# Altium PCB 24.064.PcbDoc
Units mil, origin at the board's own origin, x right, y up, seen from the top; angles counter-clockwise.
Board outline 2716.54 x 2047.24 mil, 2 copper layers (Top Layer, Bottom Layer); 5 components, 16 nets, 53 pads, 3 vias.
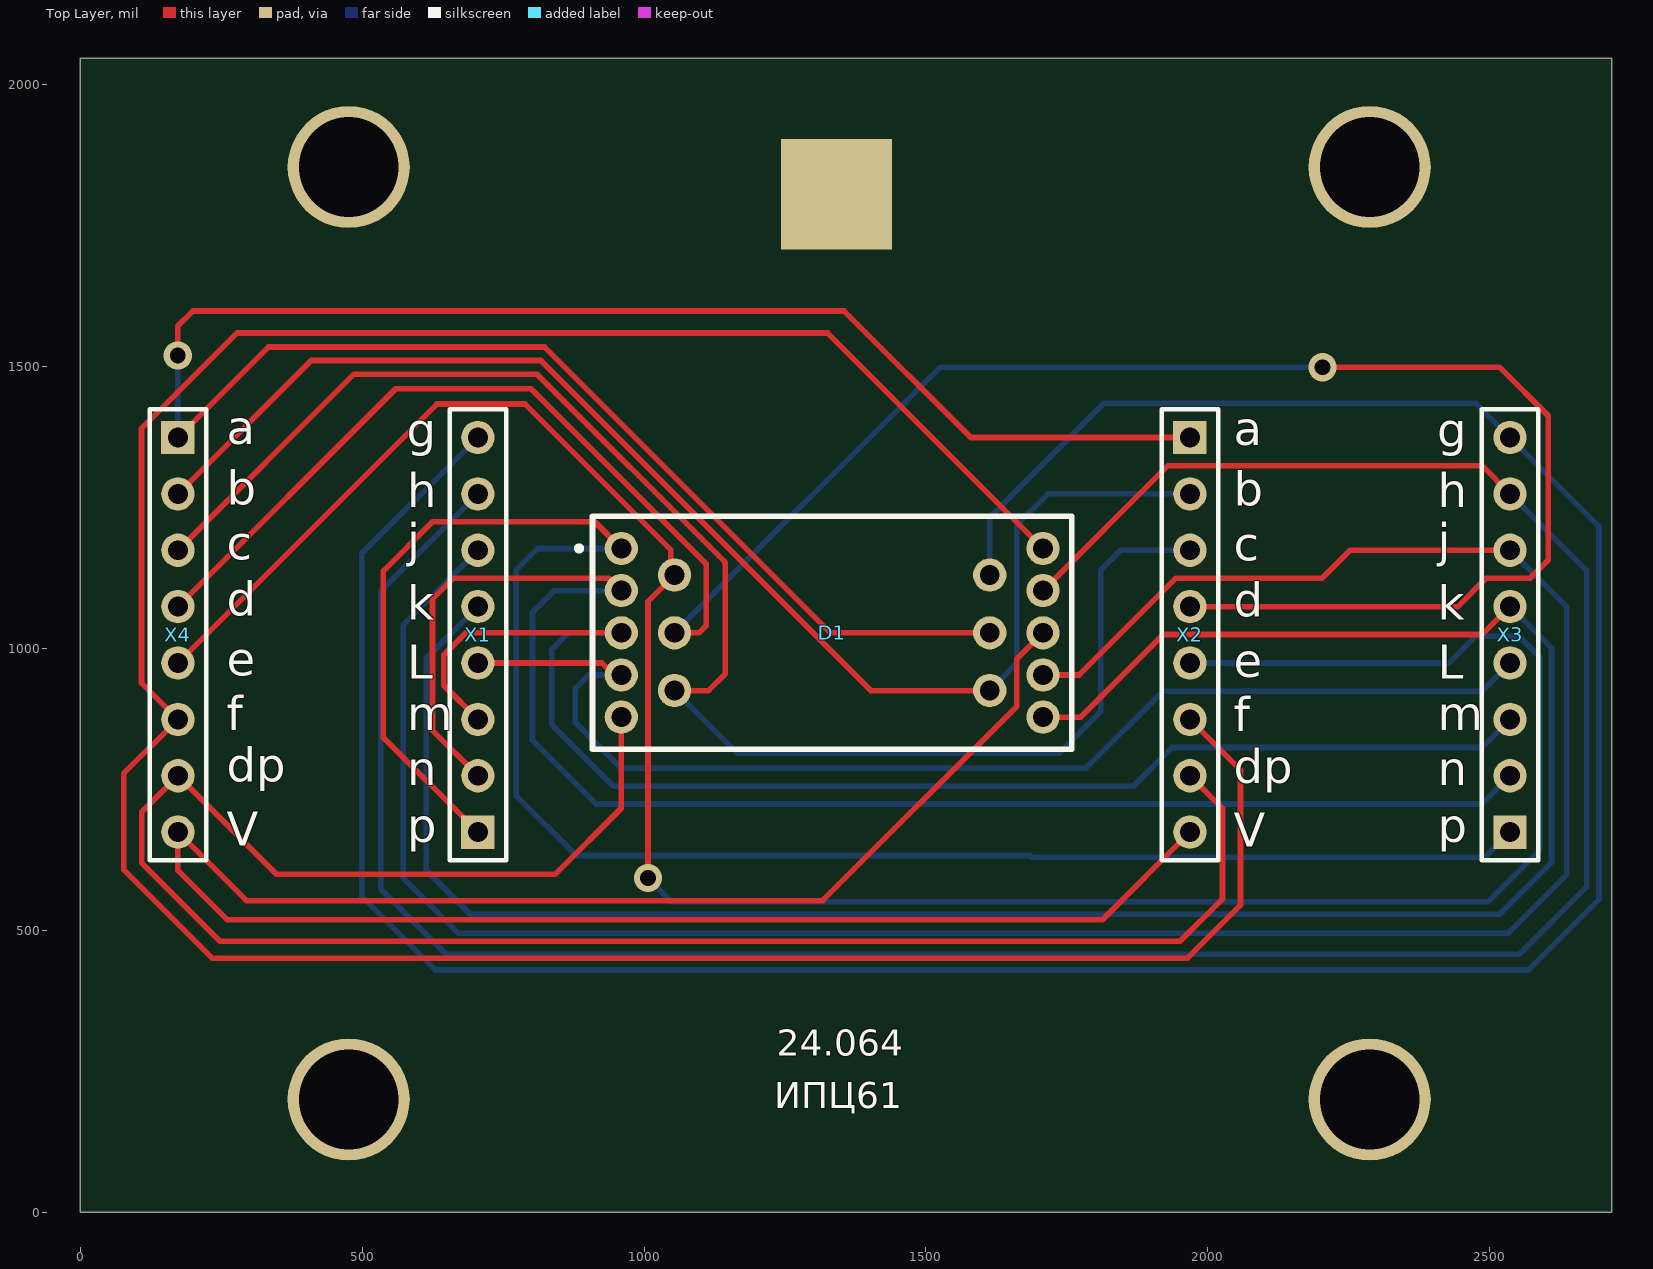
[diagram p0: Top Layer view]
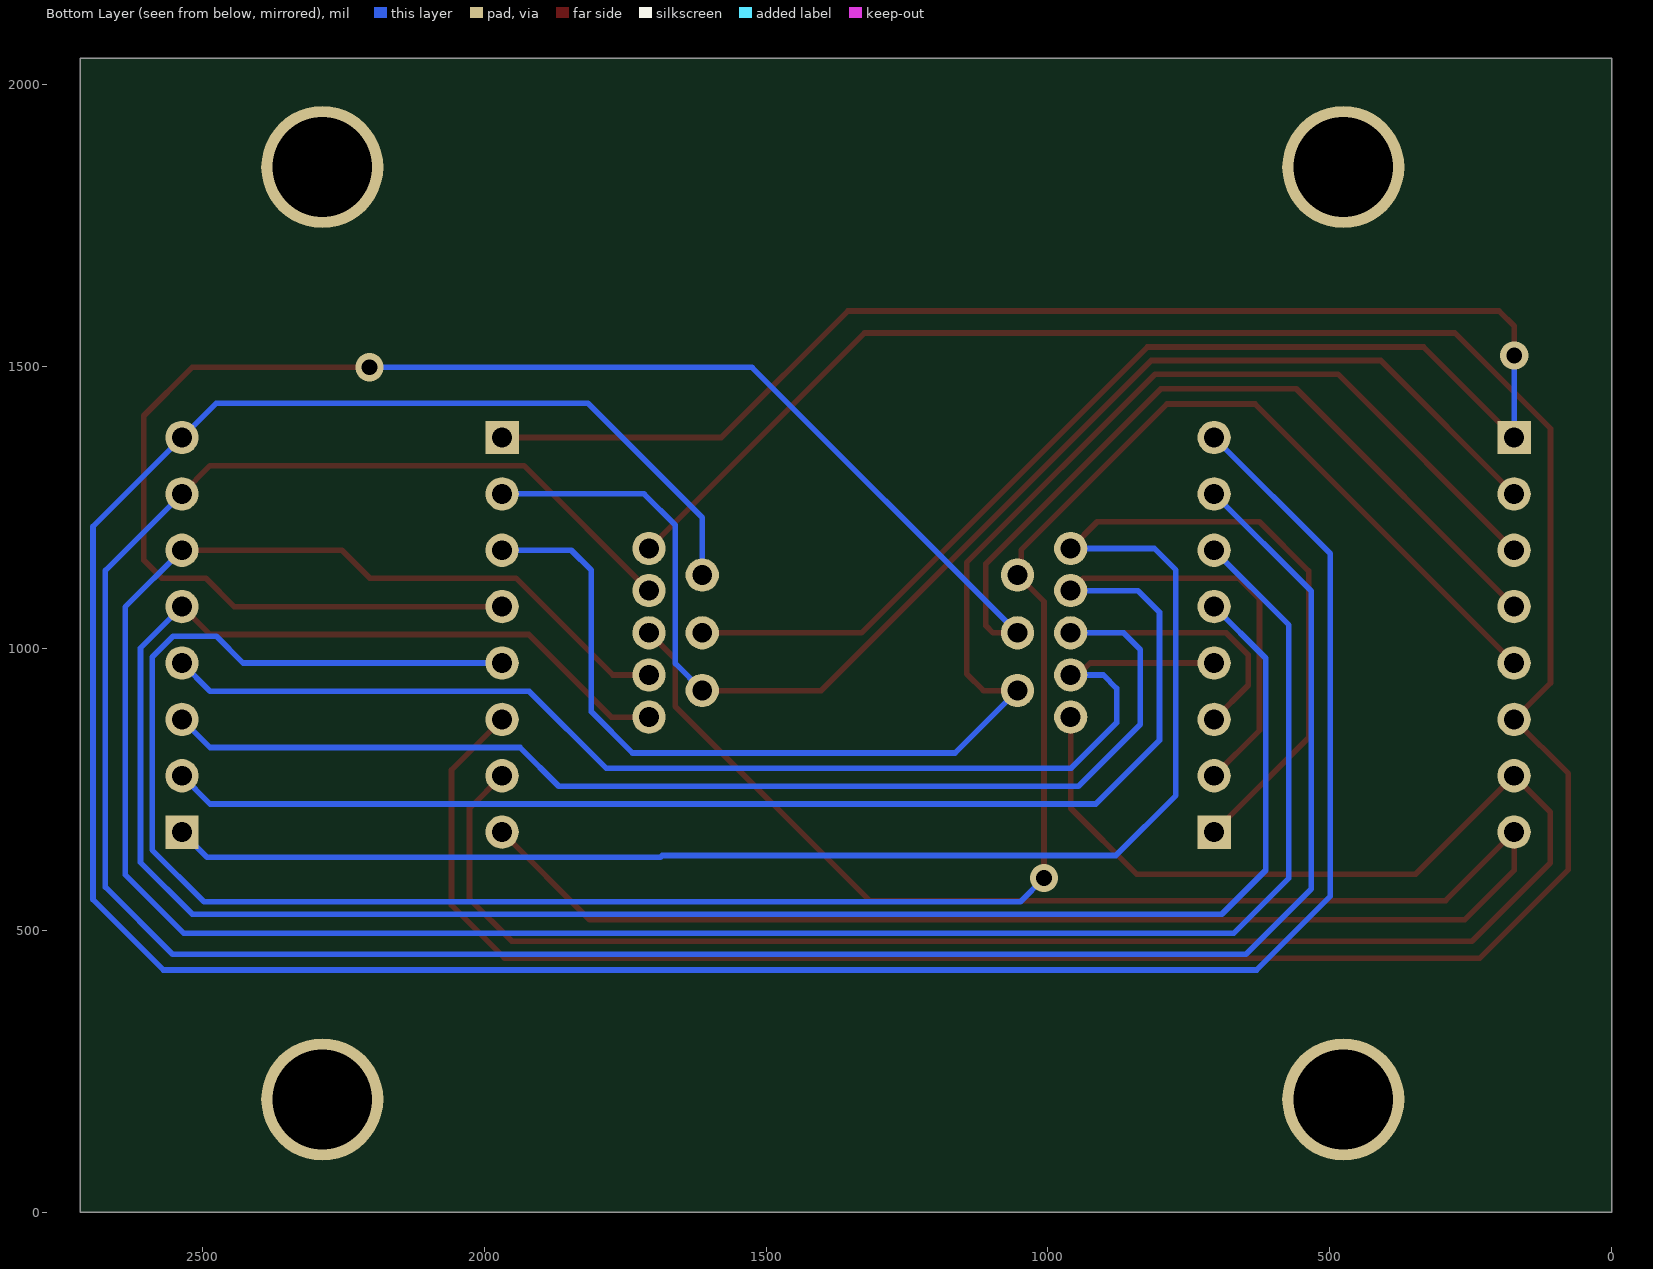
[diagram p1: Bottom Layer view, seen from below]

## Layer stack, top to bottom
Top Solder: solder mask 0.4, Solder Resist, Dk 3.5
Top Layer: signal copper 1.4
Dielectric 1: dielectric 12.6, FR-4, Dk 4.8
Bottom Layer: signal copper 1.4
Bottom Solder: solder mask 0.4, Solder Resist, Dk 3.5

## Board outline
2716.54,0 0,0 0,2047.24 2716.54,2047.24

## Design rules (kind name [scope] priority, off if disabled: settings)
Clearance [All] p1: gap=10 ignorepadtopadclearanceinfootprint=FALSE except(0: Arc-Hole Track-Hole SMDPad-Hole THPad-Hole Via-Hole Fill-Hole Poly-Hole Region-Hole Text-Hole)
PolygonConnect [All] p1: connectstyle=Relief reliefconductorwidth=10 reliefentries=4 polygonreliefangle="90 Angle" airgapwidth=10
RoutingVias [All] p1: holewidth=28 width=50 viastyle="Through Hole" minholewidth=28 minwidth=50 maxholewidth=28 maxwidth=50
SolderMaskExpansion [All] p1: expansion=4 istentingtop=FALSE
Width [All] p1: maxlimit=10 minlimit=10 preferedwidth=10
30 further rules are at their usual default settings.

## Components (designator, comment, footprint, x,y, rotation, side; value= is the part's Value field where it differs from the comment)
D1 "Indicator 14" "INDICATIR 14" 959.7,1177.8 r270 top
X1 "Header 8" HDR1X8 705.24,674.55 r90 top
X2 "Header 8" HDR1X8 1968.24,1374.55 r270 top
X3 "Header 8" HDR1X8 2536.18,674.55 r90 top
X4 "Header 8" HDR1X8 173.18,1374.55 r270 top

## Footprints (in the part's own frame and the unit in brackets; to place one, negate y for a bottom-side part, rotate by r counter-clockwise, add the part's x,y. Pads: shape width x height; smd on the part's side, far side on the other; paste and mask are expansions set on the pad)
HDR1X8 [mm] "Connector; Header; 8 Position"
  rect 1.5x1.5 hole 0.9: 1(0,0)
  round 1.5 hole 0.9: 2(2.54,0) 3(5.08,0) 4(7.62,0) 5(10.16,0) 6(12.7,0) 7(15.24,0) 8(17.78,0)
  silkscreen extent -1.27,-1.27 19.05,1.27
"INDICATIR 14" [mm] "24.064"
  round 1.5 hole 0.9: 1(0,0) 2(1.9,0) 3(3.8,0) 4(5.7,0) 5(7.6,0) 6(6.4,2.4) 7(3.8,2.4) 8(1.2,2.4) 9(1.2,16.6) 10(3.8,16.6) 11(6.4,16.6) 12(7.6,19) 13(5.7,19) 14(3.8,19) 15(1.9,19) 16(0,19)
  silkscreen extent -1.45,-2 9.05,20.3

## Part data
X1 X2 X3 X4: "Header, 8-Pin", LatestRevisionDate=17-Jul-2002, LatestRevisionNote="Re-released for DXP Platform.", Publisher="Altium Limited"

## Free pads (board coordinates)
  rect 196.85x196.85 smd: 0(1341,1806)
  round 216.54 hole 177.17: 1(476.22,200.55) 1(476.22,1854.09) 1(2287.24,200.55) 1(2287.24,1854.09)

## Via types
v1: diameter 50, hole 28, Top Layer to Bottom Layer, 3 vias

## Nets (pads, with @x,y where several pads share a name; then routed paths per layer and width w, separated by ;. In a path a pad name is that pad's centre, name@x,y a point inside that pad or via, vN(x,y) a via of type N, cw(c..) or ccw(c..) an arc to the next point about the centre after c; other vN are vias at no path point)
a: D1.10 X2.1 X4.1 | length 3813.5
  Top Layer w10: v1(173,1520) 173,1572 200,1599 1355,1599 1579.45,1374.55 X2.1 ; X4.1 333.63,1535 823.8,1535 1330.84,1027.95 D1.10@1613.3,1027.95
  Bottom Layer w10: v1(173,1520) 173,1374.73 X4.1
b: D1.11 X2.2 X4.2 | length 2423.8
  Top Layer w10: X4.2 409.63,1511 816.8,1511 1402.2,925.59 D1.11@1613.3,925.59
  Bottom Layer w10: D1.11 1661,973.58 1661,1219 1716.55,1274.55 X2.2
c: D1.6 X2.3 X4.3 | length 2794.4
  Top Layer w10: X4.3 485.63,1487 809.8,1487 1144.24,1152.55 1144.24,955.55 1114.28,925.59 D1.6@1054.24,925.59
  Bottom Layer w10: D1.6 1165.02,815 1737,815 1810,888 1810,1139 1845.55,1174.55 X2.3
d: D1.7 X2.4 X4.4 | length 4103.3
  Top Layer w10: X4.4 559.63,1461 799.8,1461 1110.24,1150.55 1110.24,1040.55 1097.65,1027.95 D1.7@1054.24,1027.95 ; X2.4 2443.55,1074.55 2494,1125 2572,1125 2604,1157 2604,1413 2518,1499 v1(2203.24,1499)
  Bottom Layer w10: D1.7 1525,1499 v1(2203.24,1499)
dp: D1.5 X2.7 X4.7 | length 3498.1
  Top Layer w10: D1.5 959.7,716.96 842.74,600 347.73,600 X4.7 109,710.37 109,620 248,481 1951,481 2026,556 2026,716.8 X2.7
e: D1.8 X2.5 X4.5 | length 4411.5
  Top Layer w10: X4.5 632.63,1434 788.8,1434 1047.72,1175.08 1047.72,1137.08 D1.8@1054.24,1130.55 ; v1(1007,593) 1007,1083.36 D1.8
  Bottom Layer w10: v1(1007,593) 1049,551 2497,551 2589,643 2589,984.7 2551.7,1022 2475,1022 2427.55,974.55 X2.5
f: D1.16 X2.6 X4.6 | length 5128.2
  Top Layer w10: D1.16 1325.53,1560 278.36,1560 108.74,1390.38 108.74,938.99 X4.6 77,778.37 77,608 234,451 1964,451 2058,545 2058,784.8 X2.6
g: D1.9 X1.8 X3.8 | length 5219.4
  Bottom Layer w10: X1.8 499,1168.31 499,561 630,430 2569,430 2694,555 2694,1216.73 X3.8 2475.18,1435.55 1816.24,1435.55 1613.3,1232.61 D1.9@1613.3,1130.32
h: D1.15 X1.7 X3.7 | length 4703
  Top Layer w10: D1.15@1707.79,1102.76 1929.58,1324.55 2486.18,1324.55 X3.7
  Bottom Layer w10: X1.7 533,1102.31 533,574 649,458 2553,458 2672,577 2672,1138.73 X3.7
j: D1.13 X1.6 X3.6 | length 4321.6
  Top Layer w10: D1.13@1707.79,953.15 1771.84,953.15 1943.69,1125 2203,1125 2252.55,1174.55 X3.6
  Bottom Layer w10: X1.6 572.74,1042.05 572.74,593 670.74,495 2532.74,495 2637,599.26 2637,1073.73 X3.6
k: D1.12 X1.5 X3.5 | length 3965.6
  Top Layer w10: D1.12@1707.79,878.35 1774.35,878.35 1921,1025 2486.63,1025 X3.5
  Bottom Layer w10: X1.5 613.74,983.05 613.74,607 691.74,529 2517.74,529 2609.74,621 2609.74,1000.99 X3.5
l: D1.4 X1.4 X3.4 | length 2184.1
  Top Layer w10: X1.4 925.26,974.55 946.43,953.39 D1.4
  Bottom Layer w10: D1.4@959.76,953.15 901.84,953.15 878.24,929.55 878.24,868.55 958.8,788 1783.69,788 1920.24,924.55 2486.18,924.55 X3.4
m: D1.3 X1.3 X3.3 | length 2533.8
  Top Layer w10: X1.3 644.74,935.06 644.74,989 683.93,1028.19 D1.3
  Bottom Layer w10: D1.3@959.76,1027.95 865.65,1027.95 836.24,998.55 836.24,865.55 945.8,756 1867.69,756 1936.24,824.55 2486.18,824.55 X3.3
n: D1.2 X1.2 X3.2 | length 2916.4
  Top Layer w10: X1.2 624.74,855.06 624.74,1088 661.74,1125 937.69,1125 D1.2 D1.2@951.32,1102.99
  Bottom Layer w10: D1.2@959.76,1102.76 840.45,1102.76 802.24,1064.55 802.24,837.55 915.24,724.55 2486.18,724.55 X3.2
p: D1.1 X1.1 X3.1 | length 3439.4
  Top Layer w10: X1.1 537.74,842.06 537.74,1138 624.74,1225 912.5,1225 D1.1
  Bottom Layer w10: D1.1@959.76,1177.56 811.25,1177.56 773.24,1139.55 773.24,739.55 879.8,633 1684.24,633 1687.21,630.02 2491.65,630.02 X3.1
VCC: D1.14 X2.8 X4.8 | length 3794.6
  Top Layer w10: D1.14 1661.24,981.7 1661.24,897.55 1316.69,553 294.73,553 X4.8 173.18,606.82 261,519 1812.69,519 X2.8

## Silkscreen, mask and mechanical layers (free items; w line width, h text height)
Top Overlay:
  text "a" at 260.24,1362.55 h60
  text "a" at 2046.24,1360.55 h60
  text "g" at 579.24,1358.55 h60
  text "g" at 2407.24,1358.55 h60
  text "b" at 260.24,1255.55 h60
  text "b" at 2046.24,1253.55 h60
  text "h" at 580.24,1250.55 h60
  text "h" at 2408.24,1250.55 h60
  text "j" at 580.24,1162.55 h60
  text "j" at 2408.24,1162.55 h60
  text "c" at 260.24,1157.55 h60
  text "c" at 2046.24,1155.55 h60
  text "d" at 260.24,1058.55 h60
  text "d" at 2046.24,1056.55 h60
  text "k" at 580.24,1051.55 h60
  text "k" at 2408.24,1051.55 h60
  text "e" at 260.24,951.55 h60
  text "e" at 2046.24,949.55 h60
  text "L" at 580.24,946.55 h60
  text "L" at 2408.24,946.55 h60
  text "f" at 260.24,855.55 h60
  text "m" at 580.24,855.55 h60
  text "m" at 2408.24,855.55 h60
  text "f" at 2046.24,853.55 h60
  text "dp" at 260.24,763.55 h60
  text "dp" at 2046.24,761.55 h60
  text "n" at 580.24,757.55 h60
  text "n" at 2408.24,757.55 h60
  text "p" at 580.24,656.55 h60
  text "p" at 2408.24,656.55 h60
  text "V" at 260.24,650.55 h60
  text "V" at 2046.24,648.55 h60
  text "24.064" at 1235.24,261.55 h80
  text "ИПЦ61" at 1231.24,168.55 h80
Mechanical 1:
  the board outline again, w10